# EAGLE board programmer (EAGLE 7.5.0)
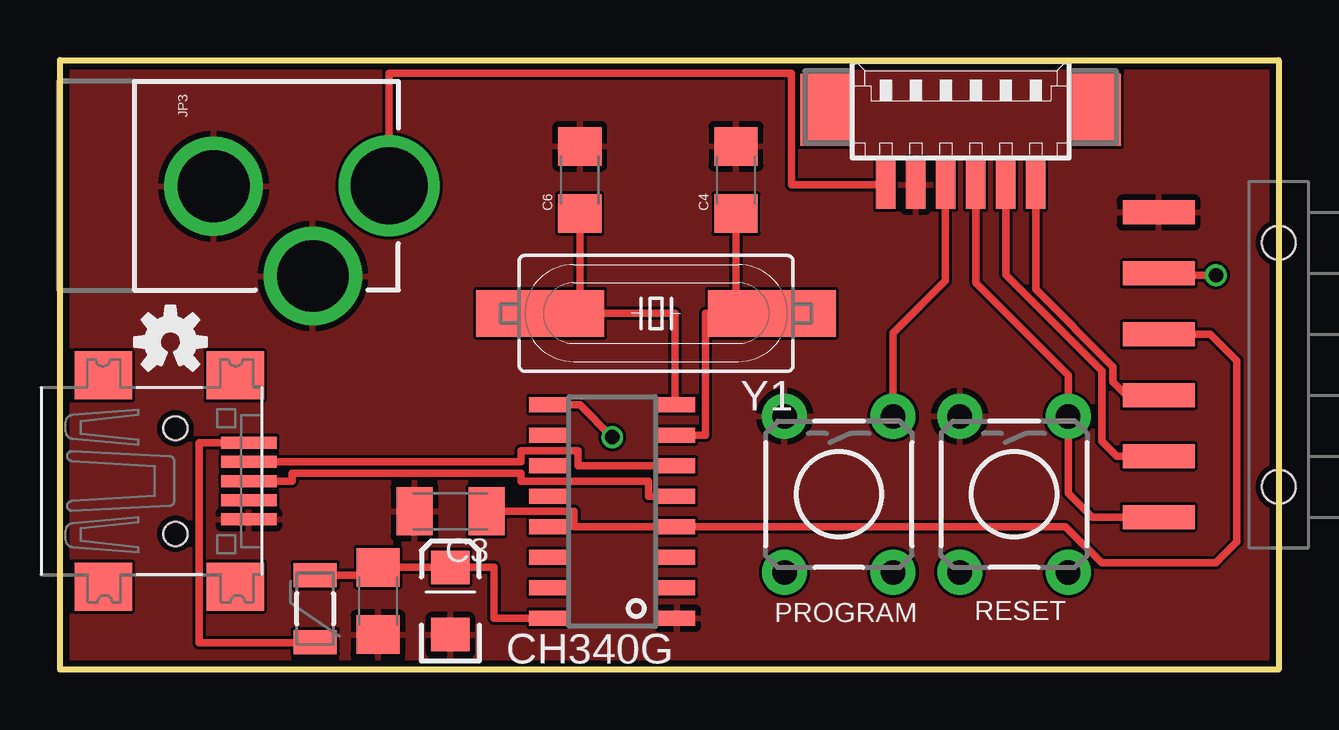
[diagram p0: board, top side]
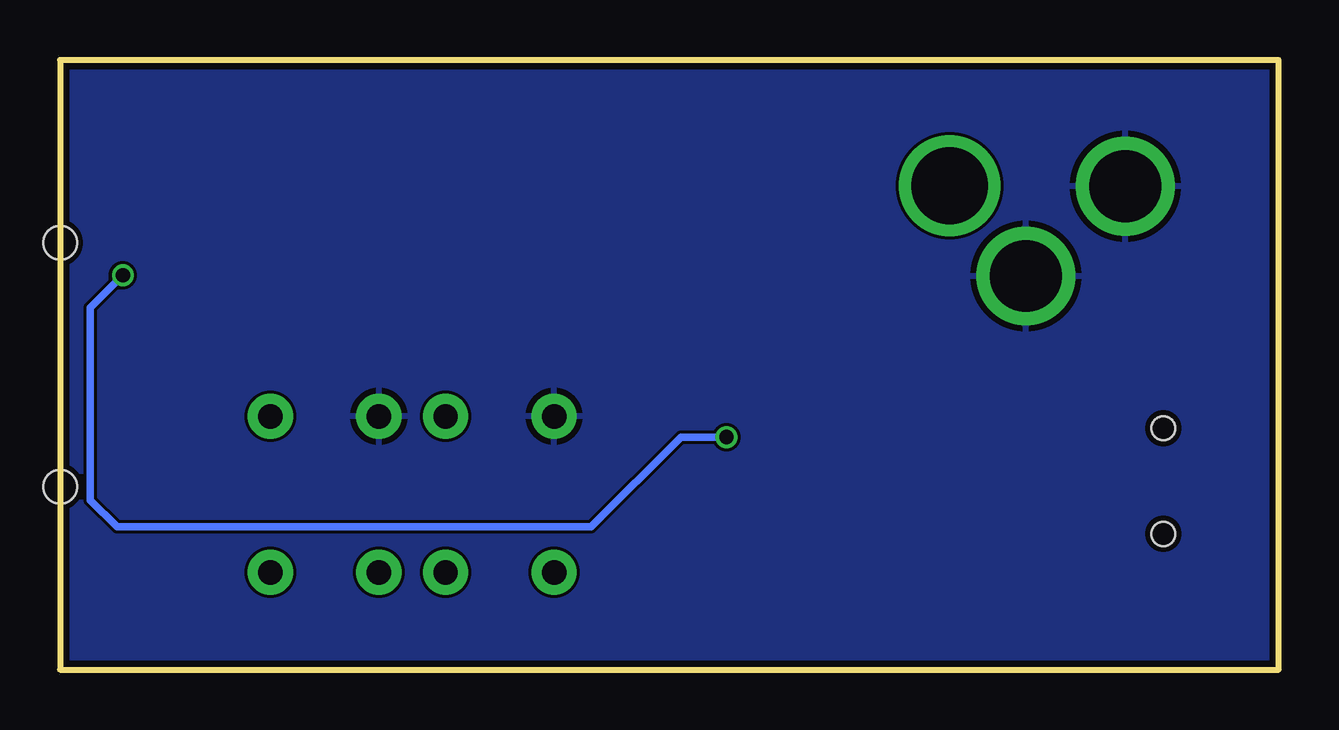
[diagram p1: board, bottom side, seen from below]

Size 50.8 x 25.4 mm. Coordinates in mm from the lower left corner, seen from the top.
Outline: 0,0 0,25.4 50.8,25.4 50.8,0 0,0
Copper layers (1*16): Top 0.035mm / dielectric 1.5mm / Bottom 0.035mm
Design rules "dirtypcbs": minimum track width 5mil, minimum drill 12mil, track to track 5mil, track to pad 5mil, pad to pad 5mil, via to via 5mil, smd to smd 0mil, copper to edge 10mil, drill to drill 10mil, minimum pad ring 10mil, minimum via ring 6mil, stop-mask expansion 2mil, vias tented up to drill 25mil, thermal gap 10mil
Net classes: 1 power: width 0.254 mm

## Footprints (pad centres in the part's own frame; a part is rotated, then mirrored left to right if it is on the bottom)
1206 = smd 1.6 x 1.8: 1 -1.4,0; 2 1.4,0
C1206K = smd 1.5 x 2: 1 -1.5,0; 2 1.5,0
EIA3216 = smd 1.4 x 1.6: A 1.4,0; C -1.4,0
USB-MINIB = smd 0.5 x 2.308: D+ 0,4.064; D- -0.8,4.064; GND 1.6,4.064; ID 0.8,4.064; VBUS -1.6,4.064 | smd 2 x 2.4: GND1 -4.4,-2; GND2 -4.4,3.5; GND3 4.4,3.5; GND4 4.4,-2 | hole 1: -2.2,1; 2.2,1
PTC-1206 = smd 1 x 1.8: 1 -1.4,0; 2 1.4,0
1X06-SMD = smd 1 x 3: 1 -6.35,5; 2 -3.81,5; 3 -1.27,5; 4 1.27,5; 5 3.81,5; 6 6.35,5 | hole 1.4: -5.08,0; 5.08,0
POWER_JACK_PTH_LOCK = drill 2.997 pad 4.115: GND 0.025,6.557; GNDBREAK 3.762,10.7 | drill 3.2 pad 4.115: PWR 0,13.878
TACTILE-PTH = drill 1.016 pad 1.88: 1 -3.251,2.261; 2 3.251,2.261; 3 -3.251,-2.261; 4 3.251,-2.261
SOIC16 = smd 0.635 x 1.524: 1 -4.445,-2.695; 2 -3.175,-2.695; 3 -1.905,-2.695; 4 -0.635,-2.695; 5 0.635,-2.695; 6 1.905,-2.695; 7 3.175,-2.695; 8 4.445,-2.695; 9 4.445,2.695; 10 3.175,2.695; 11 1.905,2.695; 12 0.635,2.695; 13 -0.635,2.695; 14 -1.905,2.695; 15 -3.175,2.695; 16 -4.445,2.695
53261-06 = smd 0.8 x 2: 1 3.125,-2.5; 2 1.875,-2.5; 3 0.625,-2.5; 4 -0.625,-2.5; 5 -1.875,-2.5; 6 -3.125,-2.5 | smd 2.1 x 3: S1 5.625,0.625; S2 -5.625,0.625
HC49UP = smd 5.334 x 1.93: 1 -4.826,0; 2 4.826,0

## Placement (x,y rotation side)
C2  0.1uF  [1206]  13.26,2.86 270 top
C3  0.1uF  [C1206K]  16.27,6.59 180 top
C4  22pf  [1206]  28.18,20.4 90 top
C5  10uF  [EIA3216]  16.27,2.86 90 top
C6  22pf  [1206]  21.67,20.4 90 top
CN1  [USB-MINIB]  3.81,7.86 270 top
F1  500mA  [PTC-1206]  10.64,2.54 90 top
FRAME1  [DUMMY]  -0.79,-1.11 0 top
JP2  RA 6Pin SMD  [1X06-SMD]  50.8,12.7 90 top
JP3  POWER_JACKPTH_LOCK  [POWER_JACK_PTH_LOCK]  -0.16,20.16 270 top
LOGO1  OSHW-LOGOS  [OSHW-LOGO-S]  4.6,13.65 0 top
PROGRAM  SWITCH-MOMENTARY-2PTH  [TACTILE-PTH]  32.46,7.3 270 top
RESET  SWITCH-MOMENTARY-2PTH  [TACTILE-PTH]  39.77,7.3 270 top
U$1  CH340G  [SOIC16]  23.02,6.59 90 top
X1  53261-06  [53261-06]  37.54,22.7 0 top
Y1  12mhz  [HC49UP]  24.84,14.84 180 top

## Library data of the parts
C2 = SparkFun-Passives
C3 = rcl
C4 C6 = SparkFun-Capacitors
C5 = SparkFun-Capacitors; PROD_ID: CAP-00811
CN1 = adafruit
F1 = SparkFun
FRAME1 = SparkFun-Aesthetics; DESIGNER: Nobody; VERSION: v01
JP2 = SparkFun-Connectors; PROD_ID: CONN-08971
JP3 = SparkFun-Connectors; PROD_ID: CONN-08197; SF_ID: PRT-00119
LOGO1 = SparkFun-Aesthetics
PROGRAM RESET = SparkFun-Electromechanical
U$1 = CH340G-USB-SERIAL
X1 = con-molex; OC_FARNELL: 1125375; OC_NEWARK: unknown
Y1 = SparkFun-FreqCtrl

## Nets
3.3V: C3.1 JP2.4 U$1.4
12V: JP3.PWR X1.6
CTS: JP2.5 U$1.9
GND: C2.2 C3.2 C4.2 C5.C C6.2 CN1.GND JP2.6 JP3.GND JP3.GNDBREAK PROGRAM.3 RESET.3 U$1.1 X1.5
GPIO0: PROGRAM.1 X1.4
N$3: CN1.VBUS F1.1
OSCI: C4.1 U$1.7 Y1.1
OSCO: C6.1 U$1.8 Y1.2
RESET: JP2.1 RESET.1 X1.3
RX: U$1.2
RXD: JP2.2 X1.2
TX: U$1.3
TXD: JP2.3 X1.1
USB_D+: CN1.D+ U$1.5
USB_D-: CN1.D- U$1.6
VCC [power]: C2.1 C5.A F1.2 U$1.16

## Tracks (layer width: path | path; a pad name or v marks a point on that pad's centre or on a via)
3.3V
  Top 0.305: C3.1 21.43,6.59 21.43,5.95 U$1.4 41.91,5.95 43.42,4.45 48.18,4.45 49.05,5.32 49.05,12.86 47.94,13.97 JP2.4
12V
  Top 0.305: X1.6 30.48,20.2 30.48,24.84 13.72,24.84 JP3.PWR
CTS  (via drill 0.6)
  Top 0.305: U$1.9 21.67,11.03 v23.02,9.68 | v48.18,16.43 45.88,16.43 JP2.5
  Bottom 0.305: v23.02,9.68 24.92,9.68 28.65,5.95 48.42,5.95 49.53,7.06 49.53,15.08 v48.18,16.43
GND
  pour Bottom: 50.8,0 0,0 0,25.4 50.8,25.4
  pour Top: 50.8,0 0,0 0,25.4 50.8,25.4
GPIO0
  Top 0.305: PROGRAM.1 34.73,14.01 36.91,16.19 36.91,20.19 X1.4
N$3
  Top 0.305: CN1.VBUS 5.79,9.46 5.79,1.11 10.64,1.11 F1.1
OSCI
  Top 0.305: C4.1 28.18,14.84 | 28.18,14.84 Y1.1 | U$1.7 26.91,9.76 26.91,14.84 28.18,14.84
OSCO
  Top 0.305: C6.1 21.67,14.84 | 21.67,14.84 Y1.2 | U$1.8 25.64,11.03 25.64,14.84 21.67,14.84
RESET
  Top 0.305: X1.3 38.18,16.11 42.03,12.27 RESET.1 42.03,7.34 43.02,6.35 JP2.1
RXD
  Top 0.305: JP2.2 44.05,8.89 43.42,9.53 43.42,12.46 39.42,16.46 X1.2
TXD
  Top 0.305: X1.1 40.67,15.85 43.89,12.62 43.89,11.99 44.45,11.43 JP2.3
USB_D+
  Top 0.305: CN1.D+ 9.68,7.86 9.68,8.18 19.21,8.18 19.21,7.86 24.53,7.86 24.53,7.22 U$1.5
USB_D-
  Top 0.305: U$1.6 21.59,8.49 21.59,9.13 19.21,9.13 19.21,8.65 9.45,8.65 9.45,8.66 CN1.D-
VCC
  Top 0.305: F1.2 13.26,3.94 C2.1 C5.A 18.1,4.26 18.1,2.14 U$1.16